# Altium PCB 2015_BeaconLed.PcbDoc
Units mil, origin at the board's own origin, x right, y up, seen from the top; angles counter-clockwise.
Board outline 550 x 890 mil, 4 copper layers (1-TOP, 2-SIGNAL, 3-GND, 4-BOT), stack 68 mil thick; 5 components, 3 nets, 6 pads, 6 vias.
Unrouted connection lines stored in the file: 2.
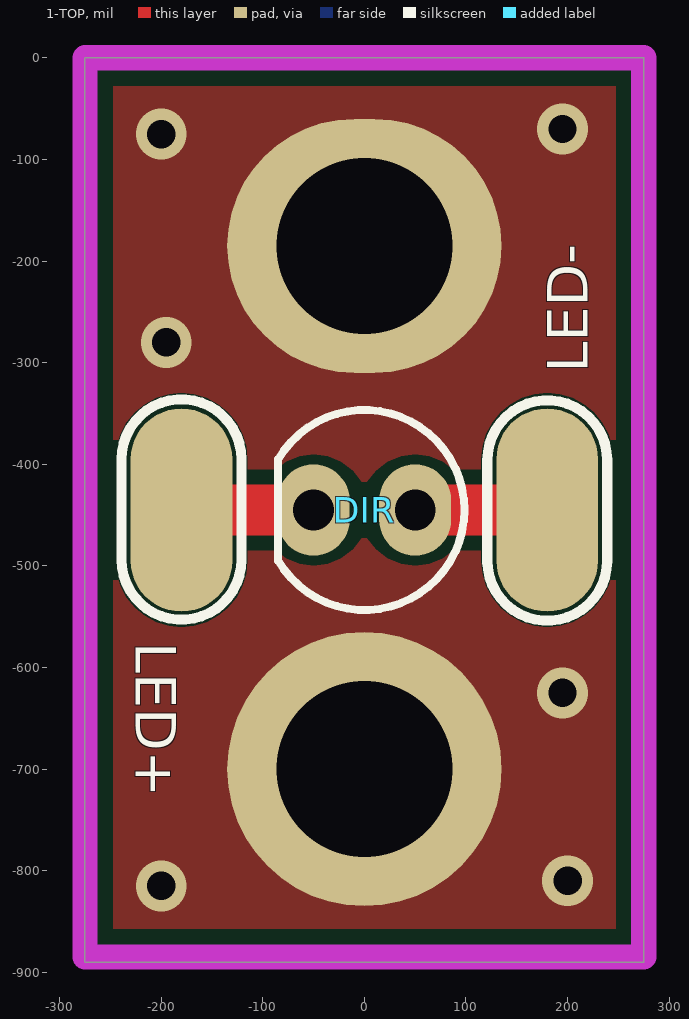
[diagram p0: 1-TOP view]
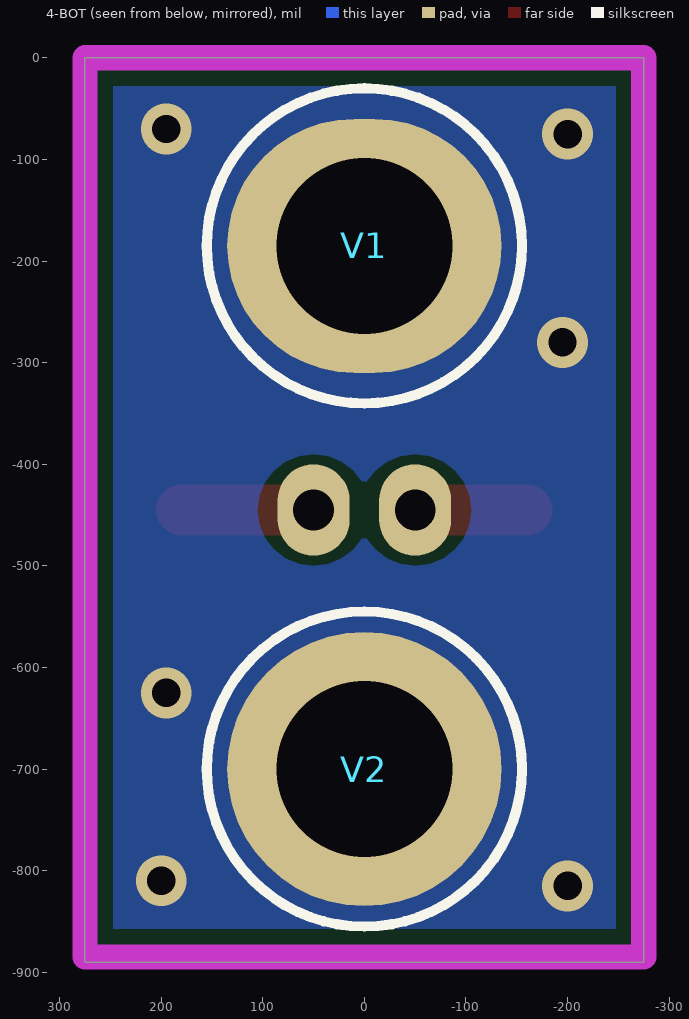
[diagram p1: 4-BOT view, seen from below]
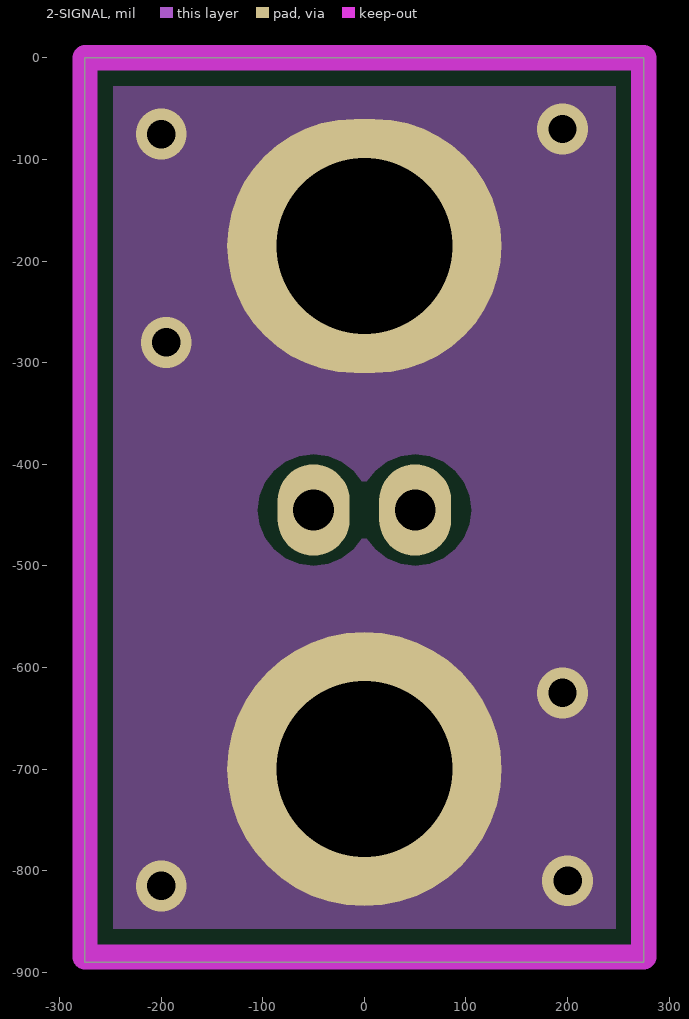
[diagram p2: 2-SIGNAL]
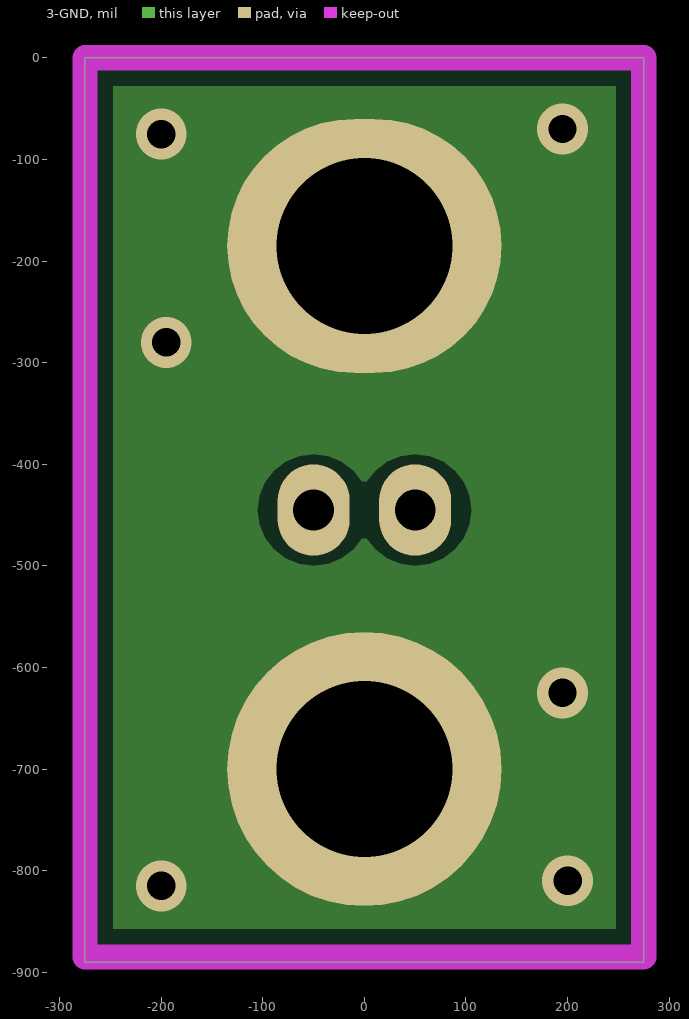
[diagram p3: 3-GND]

## Layer stack, top to bottom
Top Solder: solder mask 0.4, Solder Resist, Dk 3.5
1-TOP: signal copper 1.4
Dielectric1: core 20.8, FR-4, Dk 4.8
2-SIGNAL: signal copper 1.4
Dielectric2: prepreg 20.8, FR-4, Dk 4.8
3-GND: signal copper 1.4
Dielectric3: core 20.8, FR-4, Dk 4.8
4-BOT: signal copper 1.4
Bottom Solder: solder mask 0.4, Solder Resist, Dk 3.5

## Board outline
-275,-890 -275,0 275,0 275,-890

## Design rules (kind name [scope] priority, off if disabled: settings)
Clearance Clearance_4 [InNamedPolygon('GND_TOP') Or  InNamedPolygon('3-GND') Or  InNamedPolygon('2-GND') Or  InNamedPolygon('4-GND')] p1: gap=15
Clearance Clearance_3 [InNamedPolygon('4-GND') Or  InNamedPolygon('GND_TOP') Or  InNamedPolygon('2-GND') Or  InNamedPolygon('3-GND')] p2: gap=10
Clearance Clearance_2 [InNamedPolygon('4-GND') Or  InNamedPolygon('2-GND') Or  InNamedPolygon('3-GND') Or  InNamedPolygon('1-GND') Or  InNamedPolygon('2-GND24')] p3: gap=10
Clearance Clearance_1 [InNamedPolygon('2-GND') Or  InNamedPolygon('3-GND') Or  InNamedPolygon('1-GND') Or  InNamedPolygon('4-GND')] p4: gap=10
Clearance [All] p5: gap=7
FabricationTestpoint [(IsPad And (OnTopLayer Or OnBottomLayer))] p1: side=3 testpointundercomponent=TRUE minsize=40 maxsize=100 preferedsize=60 minholesize=0 maxholesize=40 preferedholesize=32 testpointgrid=1 allowsidetop=TRUE allowsidebottom=TRUE usegrid=TRUE gridtolerance=0.01
HoleSize [All] p1: absolutevalues=TRUE maxlimit=200 minlimit=1 maxpercent=80.000 minpercent=20.000
PlaneConnect [All] p1: planeconnectstyle=Direct reliefexpansion=20 reliefentries=4 reliefconductorwidth=10 reliefairgap=10
PolygonConnect [All] p1: connectstyle=Direct reliefconductorwidth=10 reliefentries=4 polygonreliefangle="90 Angle" airgapwidth=10
RoomDefinition 2015_BeaconLed [InComponentClass('2015_BeaconLed')] p1: confinementstyle=ConfineIn formatcopy=TRUE lockcomponents=FALSE outline 3234.92,-2391.14 2704.92,-2391.14 2704.92,-1841.14 3234.92,-1841.14
RoutingVias [All] p1: holewidth=28 width=50 viastyle="Through Hole" minholewidth=28 minwidth=50 maxholewidth=28 maxwidth=50
SilkToSolderMaskClearance SilkscreenOverComponentPads [IsPad] p1: minsilkscreentomaskgap=10 clearancetoexposedcopper=TRUE
SolderMaskExpansion [All] p1: expansion=4
Width [All] p1: maxlimit=200 minlimit=10 preferedwidth=15
25 further rules are at their usual default settings.

## Components (designator, comment, footprint, x,y, rotation, side; value= is the part's Value field where it differs from the comment)
DIR "LED" Led_5mm 0,-445 r90 top
LED+ "Pad_CMS" PAD_CMS_5.08x2.54 -180,-445 r90 top
LED- "Pad_CMS" PAD_CMS_5.08x2.54 180,-445 r270 top
V1 "Entretoise WURTH CMS" ENTRETOISE_CMS#1 0,-185 r180 bottom
V2 "Entretoise WURTH CMS" ENTRETOISE_CMS#2 0,-700 r180 bottom

## Footprints (in the part's own frame and the unit in brackets; to place one, negate y for a bottom-side part, rotate by r counter-clockwise, add the part's x,y. Pads: shape width x height; smd on the part's side, far side on the other; paste and mask are expansions set on the pad)
ENTRETOISE_CMS#1 [mil] "Entretoise CMS Wurth trou 4.4mm"
  oval 270x250 hole 173.23: 1(0,0)
  silkscreen extent -155,-155 155,155, body extent -118,-118 118,117, height 118
ENTRETOISE_CMS#2 [mil] "Entretoise CMS Wurth trou 4.4mm"
  round 270 hole 173.23: 1(0,0)
  silkscreen extent -155,-155 155,155, body extent -118,-118 118,117, height 118
Led_5mm [mil] "LED 5mm; 2 Leads"
  oval 90x70.87 hole 40: 1(0,-50) 2(0,50)
  silkscreen extent -98,-98 98,85, body extent -119,-118 118,99, height 340
PAD_CMS_5.08x2.54 [mil] "Pad pour souder un fil"
  oval 200x100 smd paste+0.2: 1(0,0)
  silkscreen extent -108,-59 109,59, body extent -85,-30 84,30, height 10

## Part data
DIR: "Typical RED, GREEN, YELLOW, AMBER GaAs LED"
LED+ LED-: "Pad pour souder un fil"
V1 V2: "Entretoise Wurth"

## Via types
v1: diameter 50, hole 28, 1-TOP to 4-BOT, 6 vias

## Nets (pads, with @x,y where several pads share a name; then routed paths per layer and width w, separated by ;. In a path a pad name is that pad's centre, name@x,y a point inside that pad or via, vN(x,y) a via of type N, cw(c..) or ccw(c..) an arc to the next point about the centre after c; other vN are vias at no path point)
GND: V1.1 V2.1
  other v1: -200,-815 200,-810 195,-625 -195,-280 -200,-75 195,-70
NetDIR_1: DIR.1 LED+.1 | length 110
  1-TOP w50: LED+.1@-160,-445 -50,-445
NetDIR_2: DIR.2 LED-.1 | length 125
  1-TOP w50: 55,-445 LED-.1

## Polygon pours and split planes (outlines as drawn)
GND on 1-TOP "GND_TOP" (solid, pour order 11): -255,-20 255,-20 255,-860 -255,-860
GND on 2-SIGNAL "2-GND" (solid, pour order 10): -255,-20 255,-20 255,-860 -255,-860
GND on 3-GND "3-GND" (solid, pour order 9): -255,-20 255,-20 255,-860 -255,-860
GND on 4-BOT "4-GND" (solid, pour order 8): -255,-20 255,-20 255,-860 -255,-860

## Keep-outs
Keep-Out Layer:
  lines w25: -275,-885 -275,0 275,0 275,-885 -275,-885